# Altium PCB PCB1.PcbDoc
Units mil, origin at the board's own origin, x right, y up, seen from the top; angles counter-clockwise.
Board outline 1650 x 1350 mil, 2 copper layers (Top Layer, Bottom Layer); 32 components, 48 nets, 136 pads, 36 vias.
Unrouted connection lines stored in the file: 32.
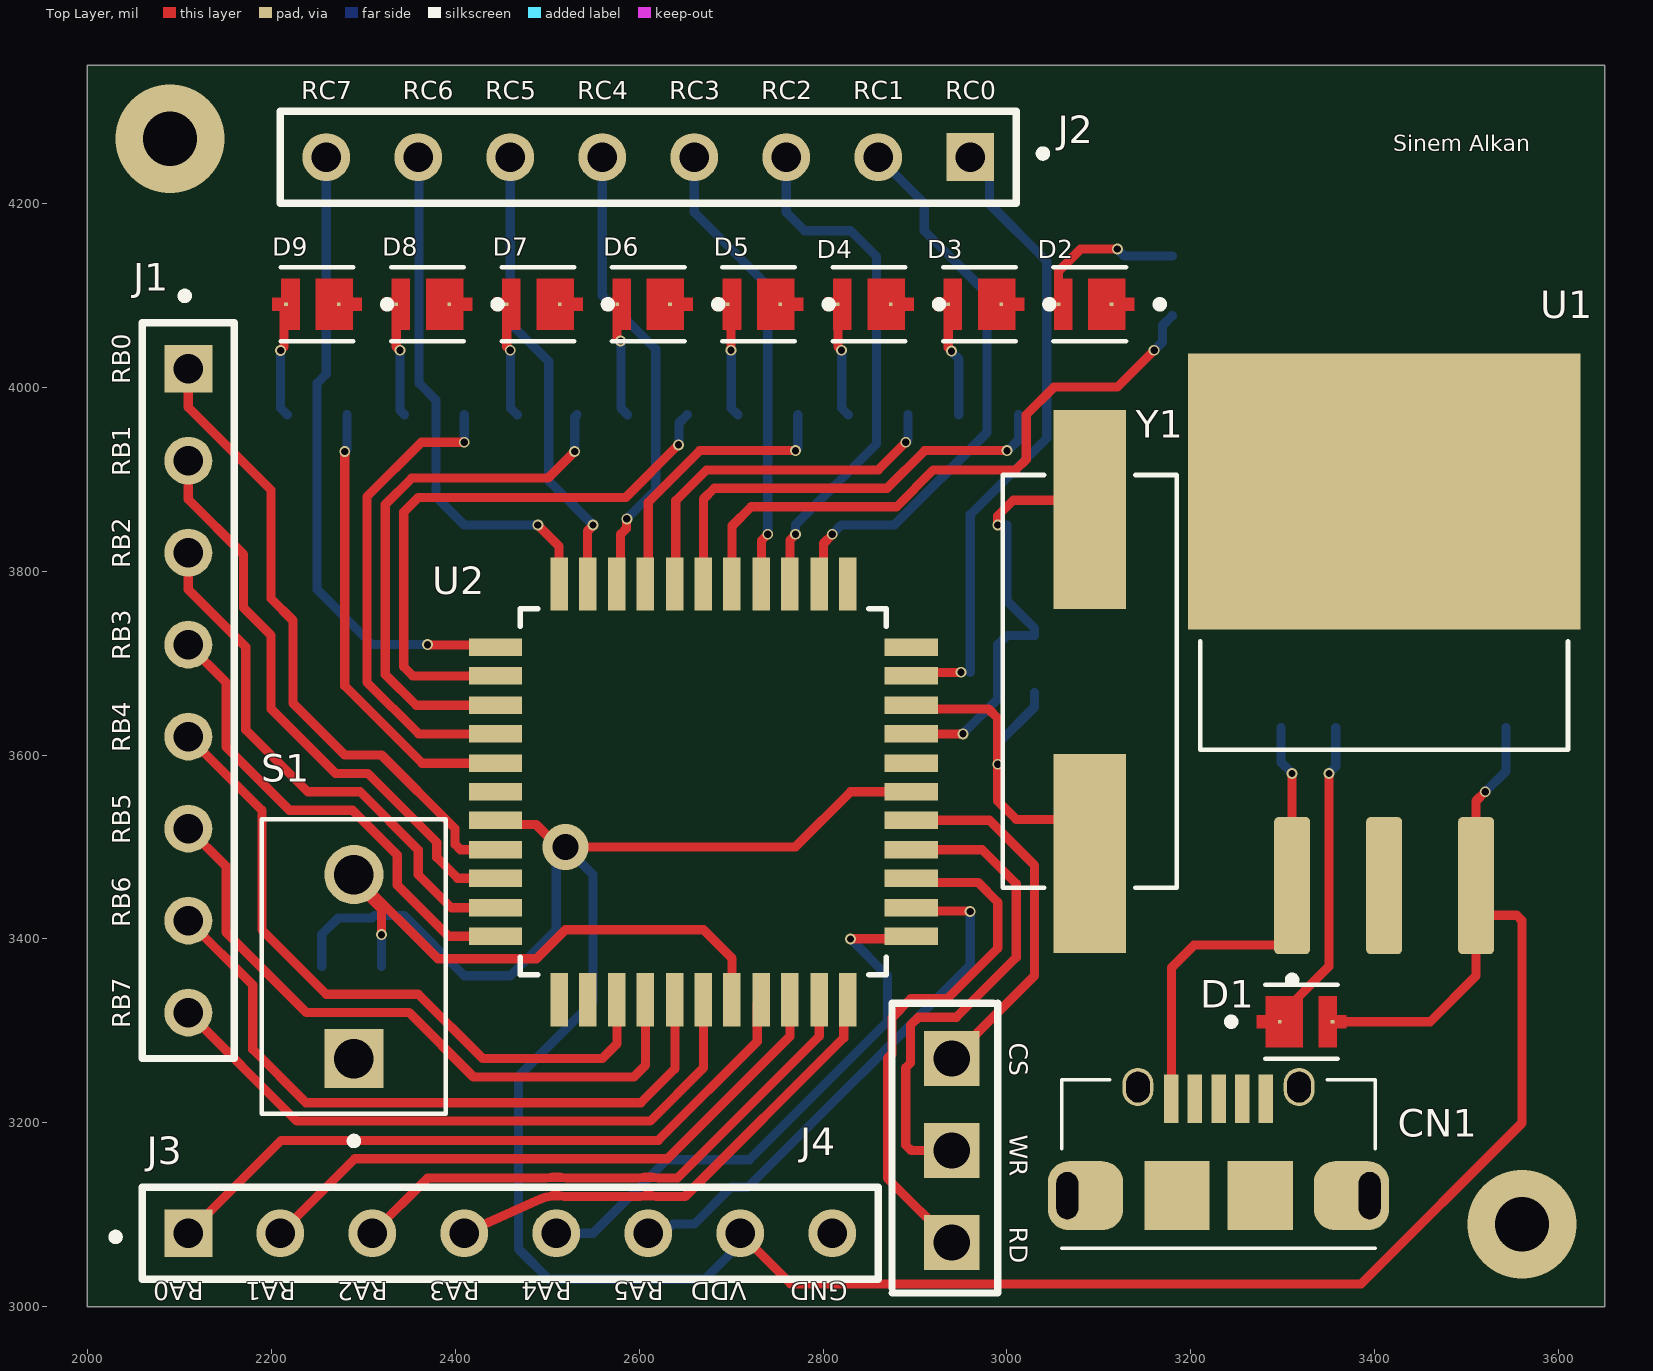
[diagram p0: Top Layer view]
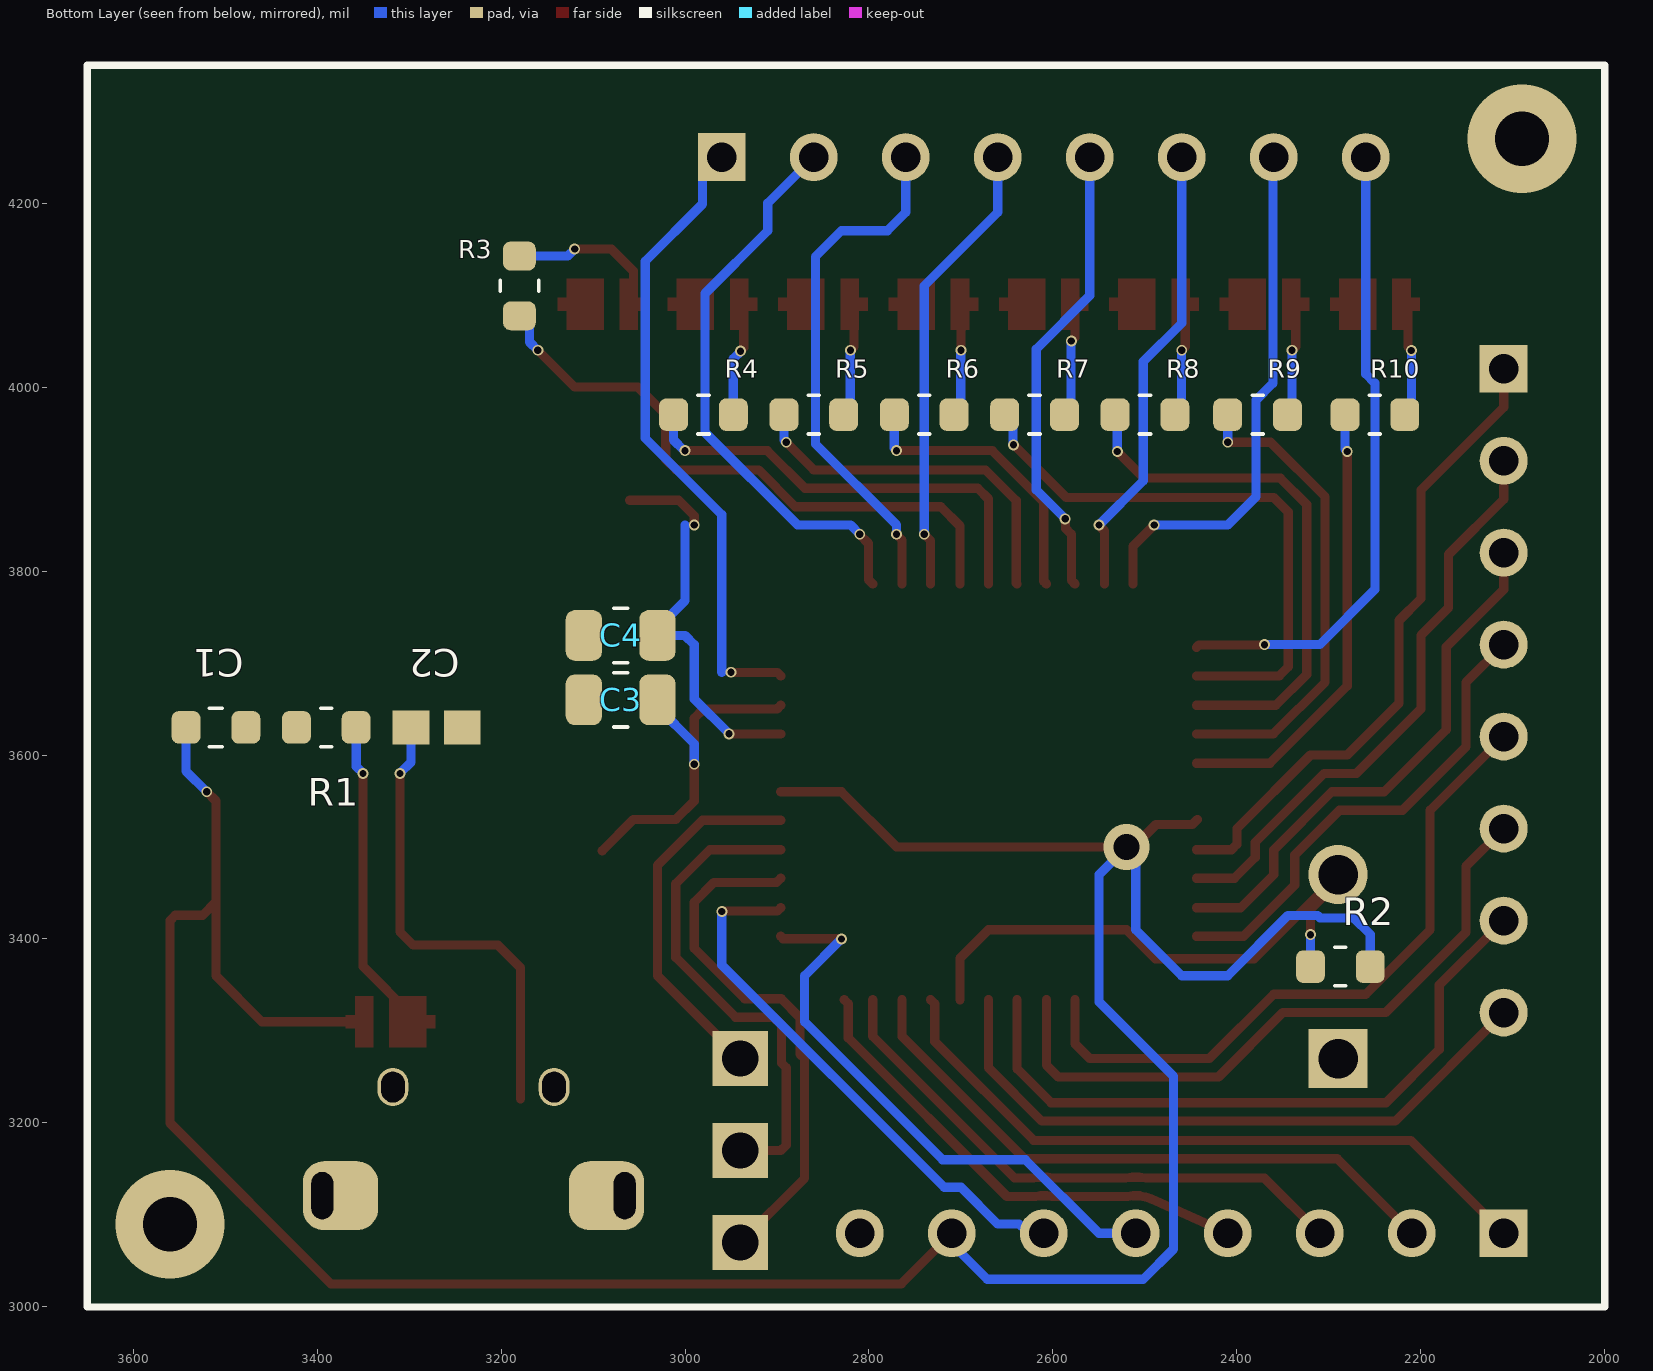
[diagram p1: Bottom Layer view, seen from below]
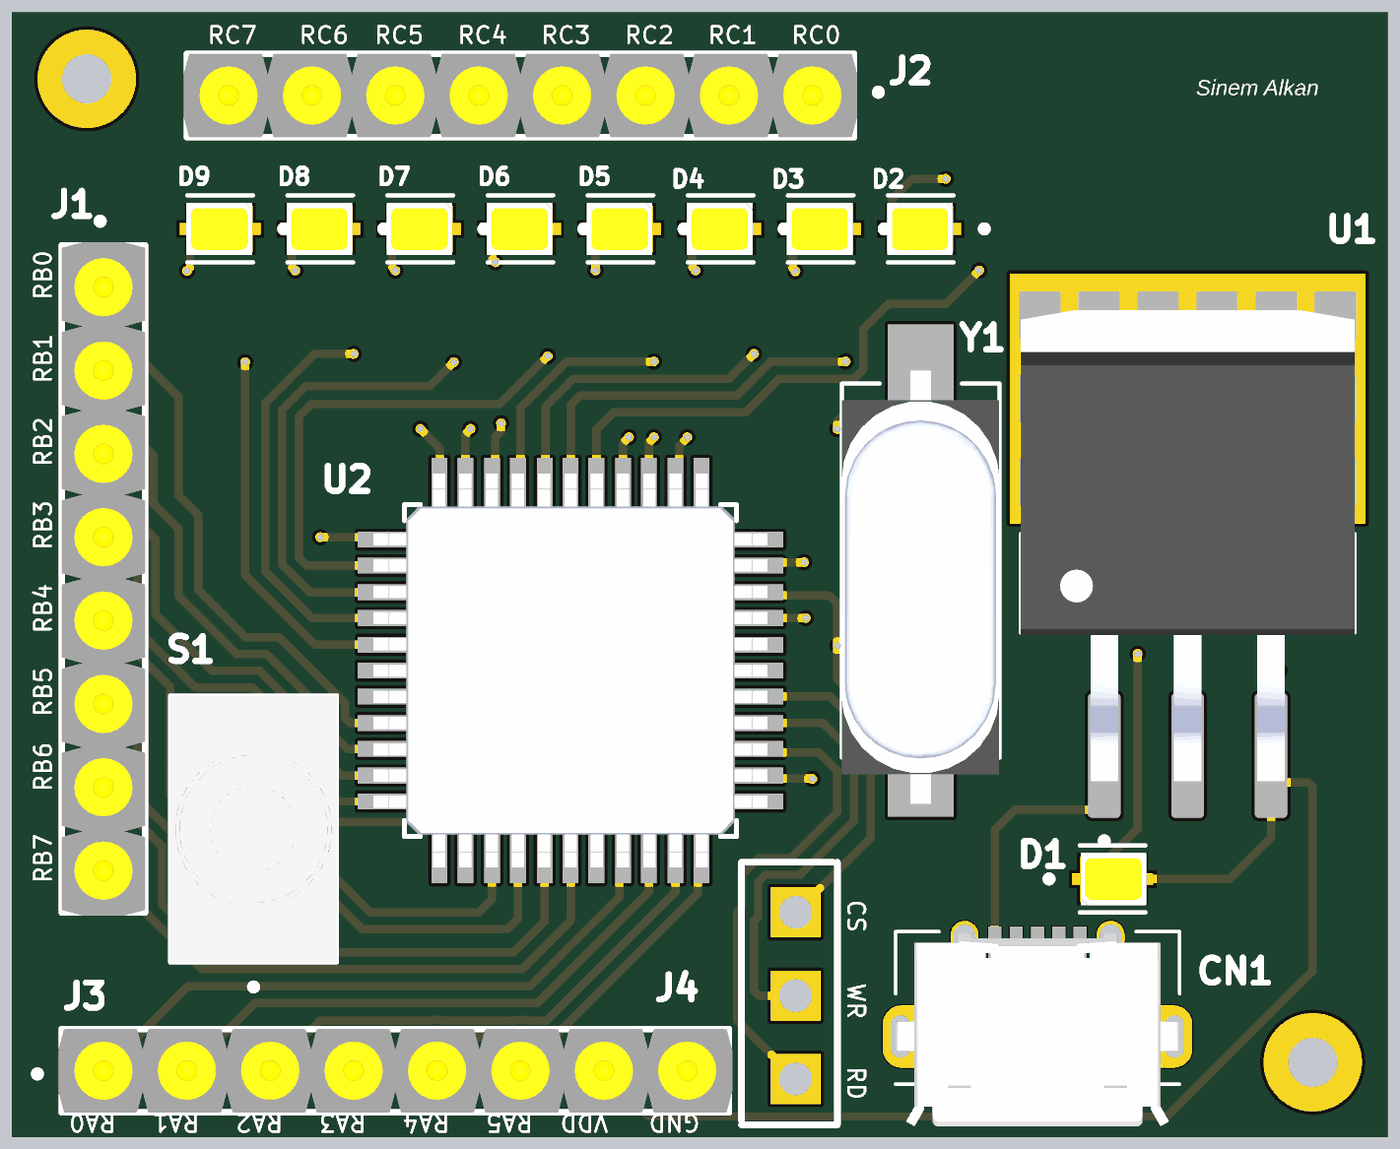
[diagram p2: 3D render of the assembled board from above, using the file's embedded part models]
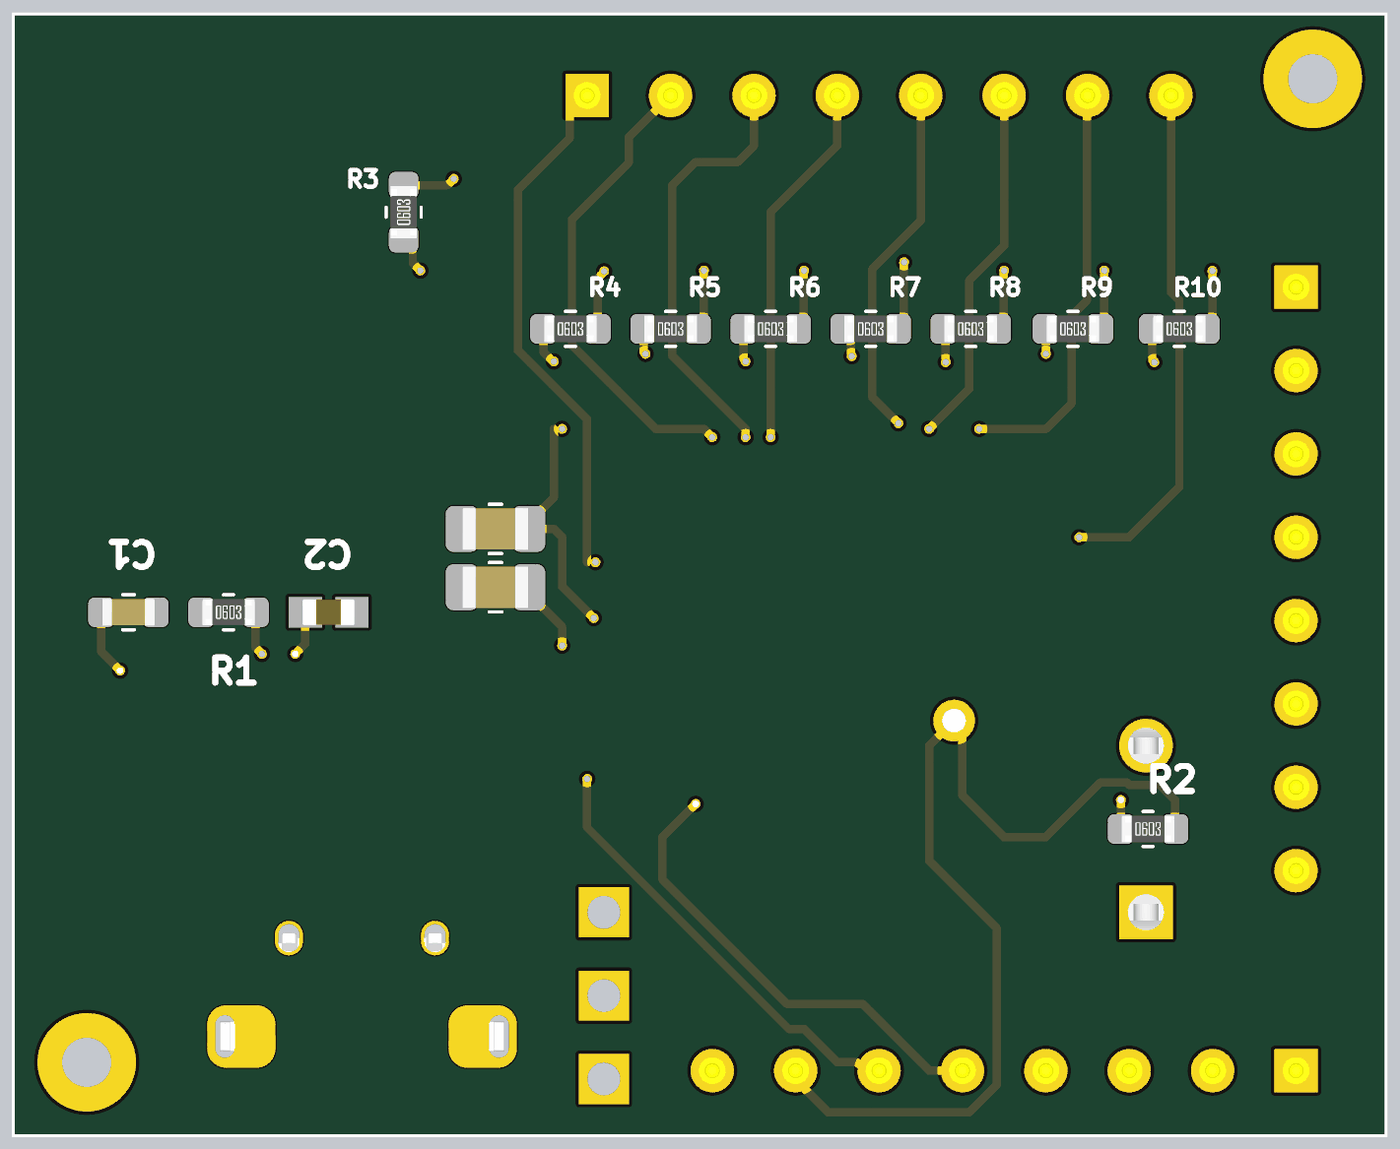
[diagram p3: 3D render of the assembled board from below, using the file's embedded part models]

## Layer stack, top to bottom
Top Solder: solder mask 0.4, Solder Resist, Dk 3.5
Top Layer: signal copper 1.4
Dielectric 1: dielectric 12.6, FR-4, Dk 4.8
Bottom Layer: signal copper 1.4
Bottom Solder: solder mask 0.4, Solder Resist, Dk 3.5

## Board outline
2000,3000 2000,4350 3650,4350 3650,3000

## Design rules (kind name [scope] priority, off if disabled: settings)
Clearance [All] p1: gap=10 ignorepadtopadclearanceinfootprint=FALSE except(0: Arc-Hole Track-Hole SMDPad-Hole THPad-Hole Via-Hole Fill-Hole Poly-Hole Region-Hole Text-Hole)
PolygonConnect [All] p1: connectstyle=Relief reliefconductorwidth=10 reliefentries=4 polygonreliefangle="90 Angle" airgapwidth=10
RoutingVias [All] p1: holewidth=28 width=50 viastyle="Through Hole" minholewidth=28 minwidth=50 maxholewidth=28 maxwidth=50
SolderMaskExpansion [All] p1: expansion=4 istentingtop=FALSE
Width [All] p1: maxlimit=10 minlimit=10 preferedwidth=10
30 further rules are at their usual default settings.

## Components (designator, comment, footprint, x,y, rotation, side; value= is the part's Value field where it differs from the comment)
C1 "CL10B104KB8NNNC" SAMSUNG_CAP_0603_090 3510,3630 r0 bottom
C2 "0.33uF" CAPC1608X90N 3270,3630 r0 bottom
C3 "CL21C270JBANNNC" SAMSUNG_CAP_0805_075 3070,3660 r180 bottom
C4 "CL21C270JBANNNC" SAMSUNG_CAP_0805_075 3070,3730 r180 bottom
CN1 "475890001" MOLEX_475890001 3230,3180 r0 top
D1 "MP-2016-1100-30-80" LED_MP-2016-1100-30-80 3320,3310 r180 top
D2 "MP-2016-1100-30-80" LED_MP-2016-1100-30-80 3090,4090 r0 top
D3 "MP-2016-1100-30-80" LED_MP-2016-1100-30-80 2970,4090 r0 top
D4 "MP-2016-1100-30-80" LED_MP-2016-1100-30-80 2850,4090 r0 top
D5 "MP-2016-1100-30-80" LED_MP-2016-1100-30-80 2730,4090 r0 top
D6 "MP-2016-1100-30-80" LED_MP-2016-1100-30-80 2610,4090 r0 top
D7 "MP-2016-1100-30-80" LED_MP-2016-1100-30-80 2490,4090 r0 top
D8 "MP-2016-1100-30-80" LED_MP-2016-1100-30-80 2370,4090 r0 top
D9 "MP-2016-1100-30-80" LED_MP-2016-1100-30-80 2250,4090 r0 top
J1 "TS-108-X-A-1" SAMTEC_TS-108-X-A-1 2110,3670 r270 top
J2 "TS-108-X-A-1" SAMTEC_TS-108-X-A-1 2610,4250 r180 top
J3 "TS-108-X-A-1" SAMTEC_TS-108-X-A-1 2460,3080 r0 top
J4 "HEADER 1X3" "HEADER 1X3_2.54" 3165,3215 r90 top
R1 "0603SAJ0331T5E" ROYALOHM_RES_0603 3390,3630 r180 bottom
R2 "0603SAJ0103T5E" ROYALOHM_RES_0603 2287.52,3370 r180 bottom
R3 "0603SAJ0331T5E" ROYALOHM_RES_0603 3180,4110 r90 bottom
R4 "0603SAJ0331T5E" ROYALOHM_RES_0603 2980,3970 r180 bottom
R5 "0603SAJ0331T5E" ROYALOHM_RES_0603 2860,3970 r180 bottom
R6 "0603SAJ0331T5E" ROYALOHM_RES_0603 2740,3970 r180 bottom
R7 "0603SAJ0331T5E" ROYALOHM_RES_0603 2620,3970 r180 bottom
R8 "0603SAJ0331T5E" ROYALOHM_RES_0603 2500,3970 r180 bottom
R9 "0603SAJ0331T5E" ROYALOHM_RES_0603 2377.52,3970 r180 bottom
R10 "0603SAJ0331T5E" ROYALOHM_RES_0603 2250,3970 r180 bottom
S1 "800AWSP9M2QE" SW_800AWSP9M2QE 2290,3370 r90 top
U1 "LM7805S/NOPB" TO254P1524X483-4N 3410,3710 r90 top
U2 "PIC16F877A-E/PT" QFP80P1200X1200X120-44N 2670,3560 r0 top
Y1 "ECS-40-S-5PX-TR" XTAL_ECS-40-S-5PX-TR 3090,3680 r90 top

## Footprints (in the part's own frame and the unit in brackets; to place one, negate y for a bottom-side part, rotate by r counter-clockwise, add the part's x,y. Pads: shape width x height; smd on the part's side, far side on the other; paste and mask are expansions set on the pad)
CAPC1608X90N [mm]
  rect 1.01x0.93 smd: 1(-0.709,0) 2(0.709,0)
  body extent -0.8,-0.4 0.8,0.4, height 0.9
"HEADER 1X3_2.54" [mil]
  rect 60x60 hole 39.37: 1(-145,225) 2(-45,225) 3(55,225)
  silkscreen extent -200,175 115,290, body extent -195,180 105,280, height 276
LED_MP-2016-1100-30-80 [mm]
  rect 0.1x0.1 smd paste-1 mask+0: A(-0.86,0) C(0.6,0)
  Top Layer region: 0.985,0.175 1.235,0.175 1.235,-0.175 0.985,-0.175 0.985,-0.7 -0.035,-0.7 -0.035,0.7 0.985,0.7
  Top Layer region: -0.485,-0.7 -0.985,-0.7 -0.985,-0.175 -1.235,-0.175 -1.235,0.175 -0.985,0.175 -0.985,0.7 -0.485,0.7
  silkscreen extent -1,-1.02 2.03,1.02, body extent -1.03,-0.8 0.97,0.8, height 0.48
MOLEX_475890001 [mm]
  rect 0.4x1.35 smd mask+0.04: 1(-1.3,1.175) 2(-0.65,1.175) 3(0,1.175) 4(0.65,1.175) 5(1.3,1.175)
  rrect60% 2.075x1.9 hole 0.6 slot 1.3 at 90 deg copper offset 0.5,0 mask+0.04: S(-4.175,-1.5)
  oval 0.85x1.05 hole 0.65 slot 0.85 at 90 deg mask+0.04: S(-2.225,1.5) S(2.225,1.5)
  rect 1.8x1.9 smd mask+0.04: S(-1.15,-1.5) S(1.15,-1.5)
  rrect60% 2.075x1.9 hole 0.6 slot 1.3 at 90 deg copper offset -0.5,0 mask+0.04: S(4.175,-1.5)
  silkscreen extent -4.33,-2.95 4.33,1.7, body extent -4.32,-4.24 4.32,1.65, height 2.73
QFP80P1200X1200X120-44N [mil]
  rect 58x19 smd: 1(-226,157) 2(-226,126) 3(-226,94) 4(-226,63) 5(-226,31) 6(-226,0) 7(-226,-31) 8(-226,-63) 9(-226,-94) 10(-226,-126) 11(-226,-157) 23(226,-157) 24(226,-126) 25(226,-94) 26(226,-63) 27(226,-31) 28(226,0) 29(226,31) 30(226,63) 31(226,94) 32(226,126) 33(226,157)
  rect 19x58 smd: 12(-157,-226) 13(-126,-226) 14(-94,-226) 15(-63,-226) 16(-31,-226) 17(0,-226) 18(31,-226) 19(63,-226) 20(94,-226) 21(126,-226) 22(157,-226) 34(157,226) 35(126,226) 36(94,226) 37(63,226) 38(31,226) 39(0,226) 40(-31,226) 41(-63,226) 42(-94,226) 43(-126,226) 44(-157,226)
  silkscreen extent -199,-199 199,199, body extent -236,-236 236,236, height 45
ROYALOHM_RES_0603 [mm]
  rrect50% 0.8x0.9 smd paste+0 mask+0.04: 1(-0.825,0) 2(0.825,0)
  silkscreen extent -0.15,-0.53 0.15,0.53, body extent -0.8,-0.4 0.8,0.4, height 0.45
SAMSUNG_CAP_0603_090 [mm]
  rrect50% 0.8x0.9 smd paste+0 mask+0.04: 1(-0.825,0) 2(0.825,0)
  silkscreen extent -0.18,-0.53 0.18,0.53, body extent -0.8,-0.41 0.8,0.41, height 0.81
SAMSUNG_CAP_0805_075 [mm]
  rrect50% 1x1.4 smd paste+0 mask+0.04: 1(-1.016,0) 2(1.016,0)
  silkscreen extent -0.19,-0.75 0.19,0.75, body extent -1,-0.64 1,0.63, height 0.76
SAMTEC_TS-108-X-A-1 [mil]
  rect 52x52 hole 32: 01(-350,0)
  round 52 hole 32: 02(-250,0) 03(-150,0) 04(-50,0) 05(50,0) 06(150,0) 07(250,0) 08(350,0)
  silkscreen extent -433,-50 400,50, body extent -404,-50 404,50, height 326
SW_800AWSP9M2QE [mm]
  rect 1.635x1.635 / inner round 1.635 / far side rect 1.635x1.635 hole 1.09: 1(-2.54,0)
  round 1.635 hole 1.09: 3(2.54,0)
  silkscreen extent -4.91,-2.54 4.07,2.54, body extent -4.07,-2.54 4.07,2.54, height 18.85
TO254P1524X483-4N [mm]
  rrect25% 3.79x0.99 smd: 1(-6.4,2.54) 2(-6.4,0) 3(-6.4,-2.54)
  rect 7.62x10.84 smd paste-6: 4(4.48,0)
  silkscreen extent -9.1,-5.08 0.35,5.08, body extent -7.18,-5.08 7.18,5.08, height 4.65
XTAL_ECS-40-S-5PX-TR [mm]
  rect 5.5x2 smd: 1(-4.75,0) 2(4.75,0)
  silkscreen extent -5.7,-2.4 5.7,2.4, body extent -7.11,-2.39 6.09,2.41, height 4.3

## Part data
C1: "CAP CER 0.1UF 50V X7R 0603", Capacitance="0.1 µF", Supplier Part Number 1=1276-1000-6-ND, Supplier 1=Digi-Key, Supplier 2=Mouser, Supplier 3="Arrow Electronics", Supplier Part Number 2=187-CL10B104KB8NNNC, Supplier Part Number 3=CL10B104KB8NNNC
C2: library part C1608X7R1H334K080AC, "0.33 ÂµF Â±10% 50V Ceramic Capacitor X7R 0603 (1608 Metric)", Package="1608 TDK", Availability="Not in stock", Check_prices=https://www.snapeda.com/parts/C1608X7R1H334K080AC/TDK/view-part/?ref=eda, MF=TDK, MP=C1608X7R1H334K080AC, Price=None, SnapEDA_Link=https://www.snapeda.com/parts/C1608X7R1H334K080AC/TDK/view-part/?ref=snap
C3 C4: "CAP CER 27PF 50V C0G/NP0 0805", Capacitance="27 pF", Supplier Part Number 1=1276-1285-1-ND, Supplier 1=Digi-Key
CN1: "CONN RCPT MICRO USB AB 5P SMD RA", Supplier Part Number 1=WM17143CT-ND, Supplier 1=Digi-Key, Supplier 2=Farnell, Supplier 3=Mouser, Supplier 4="Arrow Electronics", Supplier Part Number 2=3500670, Supplier Part Number 3=538-47589-0001, Supplier Part Number 4=47589-0001
D1 D2 D3 D4 D5 D6 D7 D8 D9: "LED Midpower Lighting series White, warm 3000K, 80 CRI, 27lm 3V 120mA 110Â°", Package=None, Availability="In Stock", Check_prices=https://www.snapeda.com/parts/MP-2016-1100-30-80/Luminus+Devices+Inc./view-part/?ref=eda, MF="Luminus Devices", MP=MP-2016-1100-30-80, Price=None, Purchase-URL=https://pricing.snapeda.com/search/part/MP-2016-1100-30-80/?ref=eda, SnapEDA_Link=https://www.snapeda.com/parts/MP-2016-1100-30-80/Luminus+Devices+Inc./view-part/?ref=snap
J1 J2 J3: "TS Series .100 Single Row Screw Machine Terminal Strip", Package=None, Availability=Bad, Check_prices=https://www.snapeda.com/parts/TS-108-G-A-1/Samtec/view-part/4699387/?ref=eda, MF=Samtec, MP=TS-108-G-A-1, Price=None, SnapEDA_Link=https://www.snapeda.com/parts/TS-108-G-A-1/Samtec/view-part/4699387/?ref=snap
R1 R3 R4 R5 R6 R7 R8 R9 R10: "RES SMD 330R OHM 5% 1/10W 0603", Resistance=330
R2: "RES SMD 10K OHM 5% 1/10W 0603", Resistance="10 k"
S1: "Pushbutton Switch SPST-NO Standard Through Hole", Package=None, Availability="In Stock", Check_prices=https://www.snapeda.com/parts/800AWSP9M2QE/E-Switch/view-part/?ref=eda, MF=E-Switch, MP=800AWSP9M2QE, Price=None, Purchase-URL=https://pricing.snapeda.com/search/part/800AWSP9M2QE/?ref=eda, SnapEDA_Link=https://www.snapeda.com/parts/800AWSP9M2QE/E-Switch/view-part/?ref=snap
U1: "1.5-A, 30-V, linear voltage regulator", Package="TO-263-3 Texas Instruments", Availability="In Stock", Check_prices=https://www.snapeda.com/parts/LM7805S/NOPB/Texas+Instruments/view-part/?ref=eda, MF="Texas Instruments", MP=LM7805S/NOPB, Price=None, Purchase-URL=https://pricing.snapeda.com/search/part/LM7805S/NOPB/?ref=eda, SnapEDA_Link=https://www.snapeda.com/parts/LM7805S/NOPB/Texas+Instruments/view-part/?ref=snap
U2: "PIC PICÂ® 16F Microcontroller IC 8-Bit 20MHz 14KB _8K x 14_ FLASH 44-TQFP _10x10_", Package="TQFP-44 Microchip", Availability=Unavailable, MF=Microchip, MP=PIC16F877A-E/PT, Price=None, SnapEDA_Link=https://www.snapeda.com/parts/PIC16F877A-E/PT/Microchip/view-part/39702/?ref=snap
Y1: "4MHz Â±30ppm Crystal Series 150 Ohms HC-49/US", Package="HC49/US ECS International", Availability=Unavailable, MF="ECS Inc.", MP=ECS-40-S-5PX-TR, Price=None, SnapEDA_Link=https://www.snapeda.com/parts/ECS-40-S-5PX-TR/ECS%20Inc./view-part/2766905/?ref=snap

## Via types
v1: diameter 11.81, hole 7.87, Top Layer to Bottom Layer, 33 vias
v2: diameter 118.11, hole 59.06, Top Layer to Bottom Layer, 2 vias
v3: diameter 50, hole 28, Top Layer to Bottom Layer, 1 vias

## Nets (pads, with @x,y where several pads share a name; then routed paths per layer and width w, separated by ;. In a path a pad name is that pad's centre, name@x,y a point inside that pad or via, vN(x,y) a via of type N, cw(c..) or ccw(c..) an arc to the next point about the centre after c; other vN are vias at no path point)
12V: C2.2 CN1.1 U1.1 | length 517.1
  Top Layer w10: CN1.1 3178.82,3368.82 3203.3,3393.3 3295.51,3393.3 3310,3407.79 U1.1 v1(3310,3580)
  Bottom Layer w10: C2.2 3297.91,3592.09 v1(3310,3580)
CHIP_SLCT: J4.3 U2.27 | length 401.6
  Top Layer w10: U2.27 2981,3529 3030,3480 3030,3360 J4.3
GND: C1.1 C2.1 C3.1 C4.1 CN1.2 CN1.3 CN1.4 CN1.5 CN1.S D2.C D3.C D4.C D5.C D6.C D7.C D8.C D9.C J3.08 R1.1 S1.1 U1.2 U1.4 U2.6 U2.12 U2.13 U2.29 U2.33 U2.34
MCLR: R2.1 S1.3 U2.18 | length 638.9
  Top Layer w10: v1(2320,3404.71) 2320,3432.58 2290,3462.58 S1.3 2381.5,3378.5 2488.5,3378.5 2520,3410 2670,3410 2701,3379 U2.18
  Bottom Layer w10: S1.3@2290,3463.27 S1.3 ; R2.1 v1(2320,3404.71)
NetD1_C: D1.C R1.2 | length 345.3
  Top Layer w10: D1.C 3296.38,3316.38 3350,3370 v1(3350,3580)
  Bottom Layer w10: v1(3350,3580) 3357.52,3587.52 R1.2
NetD2_A: D2.A R3.2 | length 173
  Top Layer w10: D2.A 3056.14,4126.14 3080,4150 v1(3120,4150)
  Bottom Layer w10: v1(3120,4150) 3127.52,4142.48 R3.2
NetD3_A: D3.A R4.2 | length 124.7
  Top Layer w10: D3.A 2936.14,4043.07 2939.62,4039.58 v1(2939.62,4039.09)
  Bottom Layer w10: v1(2939.62,4039.09) 2939.62,4038.6 2947.52,4030.71 R4.2
NetD4_A: D4.A R5.2 | length 124.7
  Top Layer w10: D4.A 2816.14,4043.86 v1(2820,4040)
  Bottom Layer w10: v1(2820,4040) 2820.35,4039.65 2820.35,3977.17 R5.2
NetD5_A: D5.A R6.2 | length 124.7
  Top Layer w10: D5.A 2696.14,4067.17 2700,4063.32 v1(2700,4040)
  Bottom Layer w10: v1(2700,4040) 2700.35,4039.65 2700.35,3977.17 R6.2
NetD6_A: D6.A R7.2 | length 124.7
  Top Layer w10: D6.A 2576.14,4053.86 v1(2580,4050)
  Bottom Layer w10: v1(2580,4050) 2580.35,4049.65 2580.35,3977.17 R7.2
NetD7_A: D7.A R8.2 | length 124.7
  Top Layer w10: D7.A 2456.14,4043.86 v1(2460,4040)
  Bottom Layer w10: v1(2460,4040) 2460.35,4039.65 2460.35,3977.17 R8.2
NetD8_A: D8.A R9.2 | length 123.7
  Top Layer w10: D8.A 2336.14,4043.86 v1(2340,4040)
  Bottom Layer w10: v1(2340,4040) 2340,3975.04 R9.2
NetD9_A: D9.A R10.2 | length 125.4
  Top Layer w10: v1(2210.35,4039.65) 2210.35,4040.14 2213.97,4043.77 2213.97,4087.83 D9.A
  Bottom Layer w10: v1(2210.35,4039.65) 2210.35,3977.17 R10.2
OSC_IN: C4.2 U2.30 Y1.2 | length 432.4
  Top Layer w10: U2.30 v1(2952.11,3623) ; v1(2990,3850) 2990,3860 3007.01,3877.01 Y1.2@3060,3877.01
  Bottom Layer w10: v1(2952.11,3623) 2990,3660.89 2990,3720 3000,3730 C4.2 3030,3737.87 3000,3767.87 3000,3850
OSC_OUT: C3.2 U2.31 Y1.1 | length 406.6
  Top Layer w10: U2.31 2900,3650 2980,3650 2990,3640 v1(2990,3590) 2990,3550 3010,3530 3055.98,3530 Y1.1@3090,3495.98
  Bottom Layer w10: v1(2990,3590) 2990,3612.13 3030,3652.13 C3.2 C3.2@3030,3667.87
RA0: J3.01 U2.19 | length 752.2
  Top Layer w10: J3.01 2211,3181 2621,3181 2728.5,3288.5 2728.5,3329.5 U2.19
RA1: J3.02 U2.20 | length 682.6
  Top Layer w10: J3.02 2291,3161 2631,3161 2764,3294 U2.20
RA2: J3.03 U2.21 | length 614.7
  Top Layer w10: J3.03 2370,3140 2499,3140 cw(c2510,3080) 2521,3140 2599,3140 cw(c2610,3080) 2621,3140 2641.72,3140 2796,3294.28 U2.21
RA3: J3.04 U2.22 | length 536.1
  Top Layer w10: J3.04 2493.19,3117.4 cw(c2510,3080) 2519,3120 2601,3120 cw(c2610,3080) 2619,3120 2650,3120 2822.5,3292.5 2822.5,3329.5 U2.22
RA4: J3.05 U2.23 | length 629.1
  Top Layer w10: v1(2830,3400) 2830.35,3400.35 2893.35,3400.35 U2.23
  Bottom Layer w10: J3.05 2550,3080 2630,3160 2720,3160 2870,3310 2870,3360 v1(2830,3400)
RA5: J3.06 U2.24 | length 594.8
  Top Layer w10: U2.24 2899.65,3430.35 2959.65,3430.35 v1(2960,3430)
  Bottom Layer w10: J3.06 2618.04,3088.04 2634.89,3088.04 2636.86,3090 2660,3090 2700,3130 2718.28,3130 2960,3371.72 v1(2960,3430)
RB0: J1.01 U2.8 | length 707.1
  Top Layer w10: J1.01 2110,3977.98 2200,3887.98 2200,3770 2223.75,3746.25 2223.75,3656.25 2280,3600 2320,3600 2400,3520 2400,3502.86 2405.86,3497 U2.8
RB1: J1.02 U2.9 | length 637
  Top Layer w10: J1.02 2110,3877.98 2170,3817.98 2170,3760 2200,3730 2200,3650 2270,3580 2305,3580 2380,3505 2380,3488.72 2402.72,3466 U2.9
RB2: J1.03 U2.10 | length 585.7
  Top Layer w10: J1.03 2110,3780 2172.5,3717.5 2172.5,3627.5 2240,3560 2296.72,3560 2360,3496.72 2360,3470 2396,3434 U2.10
RB3: J1.04 U2.11 | length 525.4
  Top Layer w10: J1.04 2151,3679 2151,3609 2220,3540 2288.43,3540 2337.19,3491.25 2337.19,3458.67 2392.86,3403 U2.11
RB4: J1.05 U2.14 | length 741.8
  Top Layer w10: J1.05 2190,3540 2190,3410 2260,3340 2360,3340 2430,3270 2560,3270 2576,3286 U2.14
RB5: J1.06 U2.15 | length 727.3
  Top Layer w10: J1.06 2151,3479 2151,3407.28 2238.28,3320 2350,3320 2420,3250 2594.14,3250 2607,3262.86 U2.15
RB6: J1.07 U2.16 | length 742.3
  Top Layer w10: J1.07 2180,3350 2180,3280 2238,3222 2602,3222 2639,3259 U2.16
RB7: J1.08 U2.17 | length 706.9
  Top Layer w10: J1.08 2228,3202 2612,3202 2670,3260 U2.17
RC0: J2.01 U2.32 | length 684.6
  Top Layer w10: U2.32 2899.65,3689.65 2949.65,3689.65 v1(2950,3690)
  Bottom Layer w10: 2960,3690 2960,3861.34 3043.23,3944.57 3043.23,4136.77 2981,4199 2981,4229 J2.01
RC1: J2.02 U2.35 | length 622.2
  Top Layer w10: U2.35 2800.49,3790.49 2800.49,3830 2810,3839.51 v1(2810,3840)
  Bottom Layer w10: v1(2810,3840) 2820,3850 2877.59,3850 2978.27,3950.68 2978.27,4101.73 2910,4170 2910,4200 J2.02
RC2: J2.03 U2.36 | length 573
  Top Layer w10: U2.36 2764,3833.51 2770,3839.51 v1(2770,3840)
  Bottom Layer w10: J2.03 2760,4190 2780,4170 2830,4170 2858.27,4141.73 2858.27,3938.27 2770,3850 v1(2770,3840)
RC3: J2.04 U2.37 | length 500
  Top Layer w10: U2.37 2733,3833 v1(2740,3840)
  Bottom Layer w10: J2.04 2660,4190 2740,4110 v1(2740,3840)
RC4: J2.05 U2.42 | length 505.6
  Top Layer w10: U2.42 2580,3790 2580,3840 2586.42,3846.42 2586.42,3856.42 v1(2586.76,3856.76)
  Bottom Layer w10: J2.05 2560,4099.56 2618.27,4041.3 2618.27,3888.27 v1(2586.76,3856.76)
RC5: J2.06 U2.43 | length 503.8
  Top Layer w10: U2.43 2544,3843.51 2550,3849.51 v1(2550,3850)
  Bottom Layer w10: J2.06 2460,4069.56 2501.73,4027.83 2501.73,3898.27 v1(2550,3850)
RC6: J2.07 U2.44 | length 574.2
  Top Layer w10: v1(2490,3850) 2513,3827 U2.44
  Bottom Layer w10: J2.07 2360.91,4249.09 2360.91,4004.2 2379.25,3985.85 2379.25,3880.75 2410,3850 v1(2490,3850)
RC7: J2.08 U2.1 | length 694.2
  Top Layer w10: v1(2370,3720) 2370.35,3719.65 2441.35,3719.65 U2.1
  Bottom Layer w10: J2.08 2260,4014.32 2250,4004.32 2250,3780 2310,3720 v1(2370,3720)
RD0: R3.1 U2.38 | length 675.5
  Top Layer w10: U2.38 2701,3849 2722,3870 2880,3870 2920,3910 3009.56,3910 3020.91,3921.34 3020.91,3969.76 3051.15,4000 3120,4000 v1(3160,4040)
  Bottom Layer w10: v1(3160,4040) 3169.06,4049.06 3169.06,4066.99 3179.59,4077.52 R3.1
RD1: R4.1 U2.39 | length 488.9
  Top Layer w10: U2.39 2670,3878.28 2681.72,3890 2696.4,3890 2869.56,3890 2910.47,3930.91 v1(3000,3930.91)
  Bottom Layer w10: v1(3000,3930.91) 3000.35,3931.25 3001.25,3931.25 3012.48,3942.48 R4.1
RD2: R5.1 U2.40 | length 398.3
  Top Layer w10: U2.40 2640,3787 2640,3876.57 2673.43,3910 2860,3910 v1(2890,3940)
  Bottom Layer w10: v1(2890,3940) 2892.48,3942.48 R5.1
RD3: R6.1 U2.41 | length 313.4
  Top Layer w10: U2.41 2610,3789 2610,3874.85 2666.05,3930.91 v1(2770,3930.91)
  Bottom Layer w10: v1(2770,3930.91) 2770,3931.4 2772.48,3933.88 R6.1
RD4: R7.1 U2.2 | length 637.9
  Top Layer w10: U2.2 2354,3686 2344.14,3695.86 2344.14,3864.14 2360,3880 2585.58,3880 v1(2642.79,3937.21)
  Bottom Layer w10: v1(2642.79,3937.21) 2642.79,3937.7 2643.51,3938.41 2643.51,3961.03 R7.1
RD5: R8.1 U2.3 | length 589.4
  Top Layer w10: U2.3 2357.72,3654 2324.14,3687.57 2324.14,3872.43 2352.76,3901.04 2501.04,3901.04 v1(2530,3930)
  Bottom Layer w10: v1(2530,3930) 2530,3967.52 R8.1
RD6: R9.1 U2.4 | length 525
  Top Layer w10: v1(2410,3940) 2363.43,3940 2304.14,3880.71 2304.14,3679.29 2360.43,3623 U2.4
  Bottom Layer w10: v1(2410,3940) R9.1
RD7: R10.1 U2.5 | length 494.7
  Top Layer w10: v1(2280,3930) 2280,3675.15 2364.15,3591 U2.5
  Bottom Layer w10: v1(2280,3930) 2282.48,3932.48 R10.1
READ: J4.1 U2.25 | length 576.6
  Top Layer w10: U2.25 2900.5,3461.5 2968.5,3461.5 2990,3440 2990,3390 2935,3335 2895.5,3335 2875,3314.5 2875,3275 2870,3270 2870,3140 J4.1
VDD: C1.2 D1.A J3.07 R2.2 U1.3 U2.7 U2.28 | length 3382.2
  Top Layer w10: U2.7@2443,3530 U2.7 2448.5,3524.5 2487.93,3524.5 2512.43,3500 v3(2520,3500) 2770,3500 2830,3560 U2.28 ; J3.07 2765,3025 3385,3025 3560,3200 3560,3420 3554.14,3425.86 3524.49,3425.86 U1.3@3510,3440.35 ; D1.A 3460,3310 3510,3360 U1.3@3510,3440.35 ; v1(3520,3560) 3510,3550 U1.3 U1.3@3510,3440.35
  Bottom Layer w10: R2.2 2255.04,3404.96 2272.89,3422.81 2309.54,3422.81 2312.35,3425.62 2344.38,3425.62 2410,3360 2460,3360 2510,3410 2510,3494.14 2515.86,3500 v3(2520,3500) 2550,3470 2550,3331.6 2469,3250.6 2469,3063.02 2502.02,3030 2671.37,3030 2710,3068.63 J3.07 ; v1(3520,3560) 3542.48,3582.48 C1.2
WRITE: J4.2 U2.26 | length 539.7
  Top Layer w10: U2.26 2973,3497 3010,3460 3010,3380 2945,3315 2943.28,3315 2903.79,3315 2895,3306.21 2895,3266.72 2895,3265 2890,3260 2890,3175.86 2895.86,3170 J4.2
copper on no net:
  other v2: 3560,3090 2090,4270

## Silkscreen, mask and mechanical layers (free items; w line width, h text height)
Top Overlay:
  text "RC7" at 2233,4313 h20
  text "RC6" at 2343,4313 h20
  text "RC5" at 2433,4313 h20
  text "RC4" at 2533,4313 h20
  text "RC3" at 2633,4313 h20
  text "RC2" at 2733,4313 h20
  text "RC1" at 2833,4313 h20
  text "RC0" at 2933,4313 h20
  text "Sinem Alkan" at 3420,4250.32 h30
  text "RB0" at 2047,4003 h20 r90
  text "RB1" at 2047,3903 h20 r90
  text "RB2" at 2047,3803 h20 r90
  text "RB3" at 2047,3703 h20 r90
  text "RB4" at 2047,3603 h20 r90
  text "RB5" at 2047,3503 h20 r90
  text "RB6" at 2047,3413 h20 r90
  text "RB7" at 2047,3303 h20 r90
  text "CS" at 3003,3287 h20 r270
  text "WR" at 3003,3187 h20 r270
  text "RD" at 3003,3087 h20 r270
  text "RA0" at 2127,3027 h20 r180
  text "RA1" at 2227,3027 h20 r180
  text "RA2" at 2327,3027 h20 r180
  text "RA3" at 2427,3027 h20 r180
  text "RA4" at 2527,3027 h20 r180
  text "RA5" at 2627,3027 h20 r180
  text "VDD" at 2717,3027 h20 r180
  text "GND" at 2827,3027 h20 r180
Bottom Overlay:
  the board outline again, w7.87